# Altium PCB proy_10A_PCB_1_v1i1.PcbDoc
Units mil, origin at the board's own origin, x right, y up, seen from the top; angles counter-clockwise.
Board outline 4400 x 1900 mil, 2 copper layers (Top Layer, Bottom Layer); 42 components, 44 nets, 157 pads, 20 vias.
Unrouted connection lines stored in the file: 2.
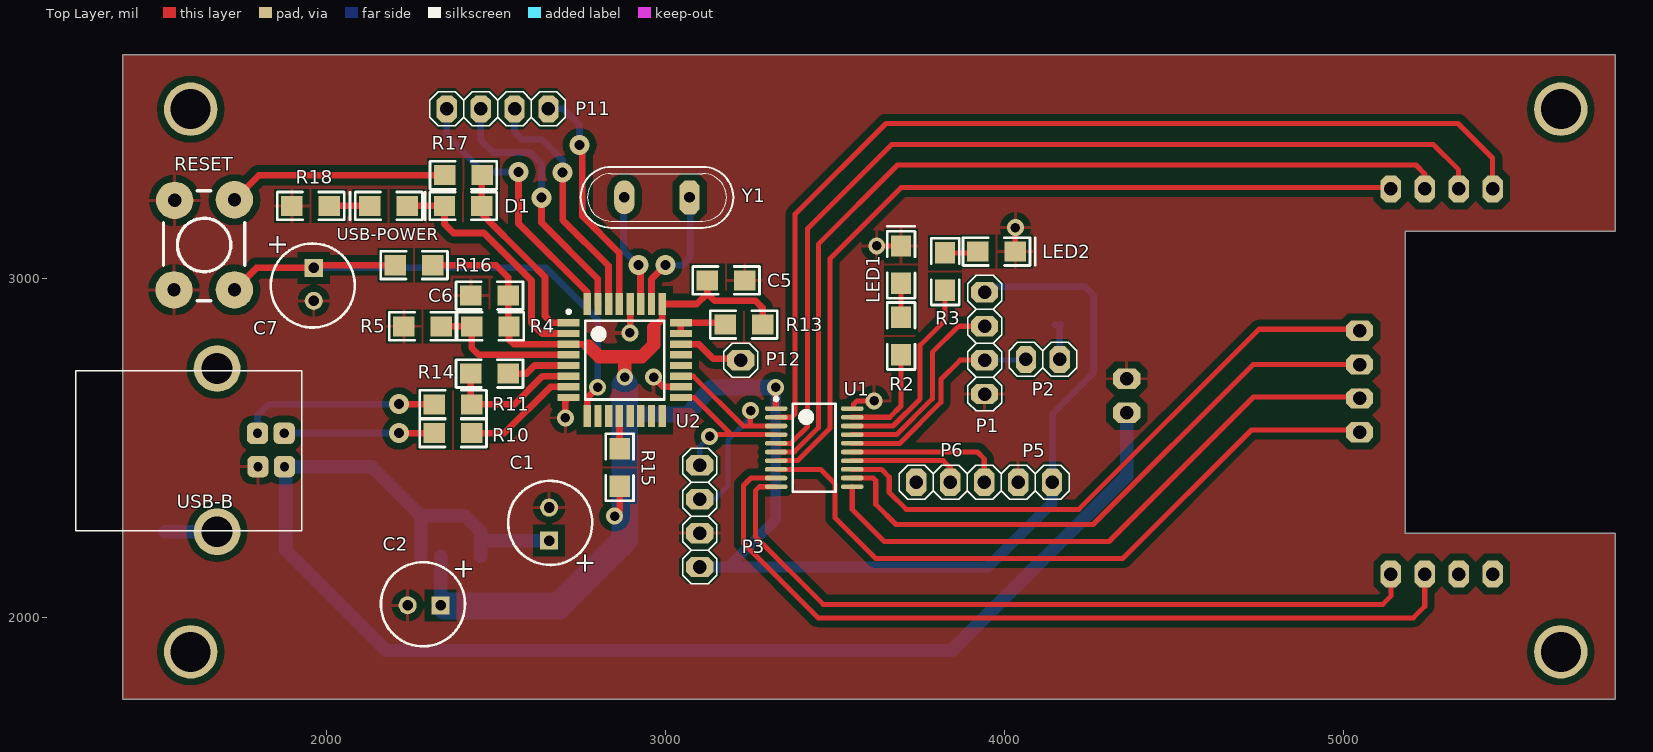
[diagram p0: Top Layer view]
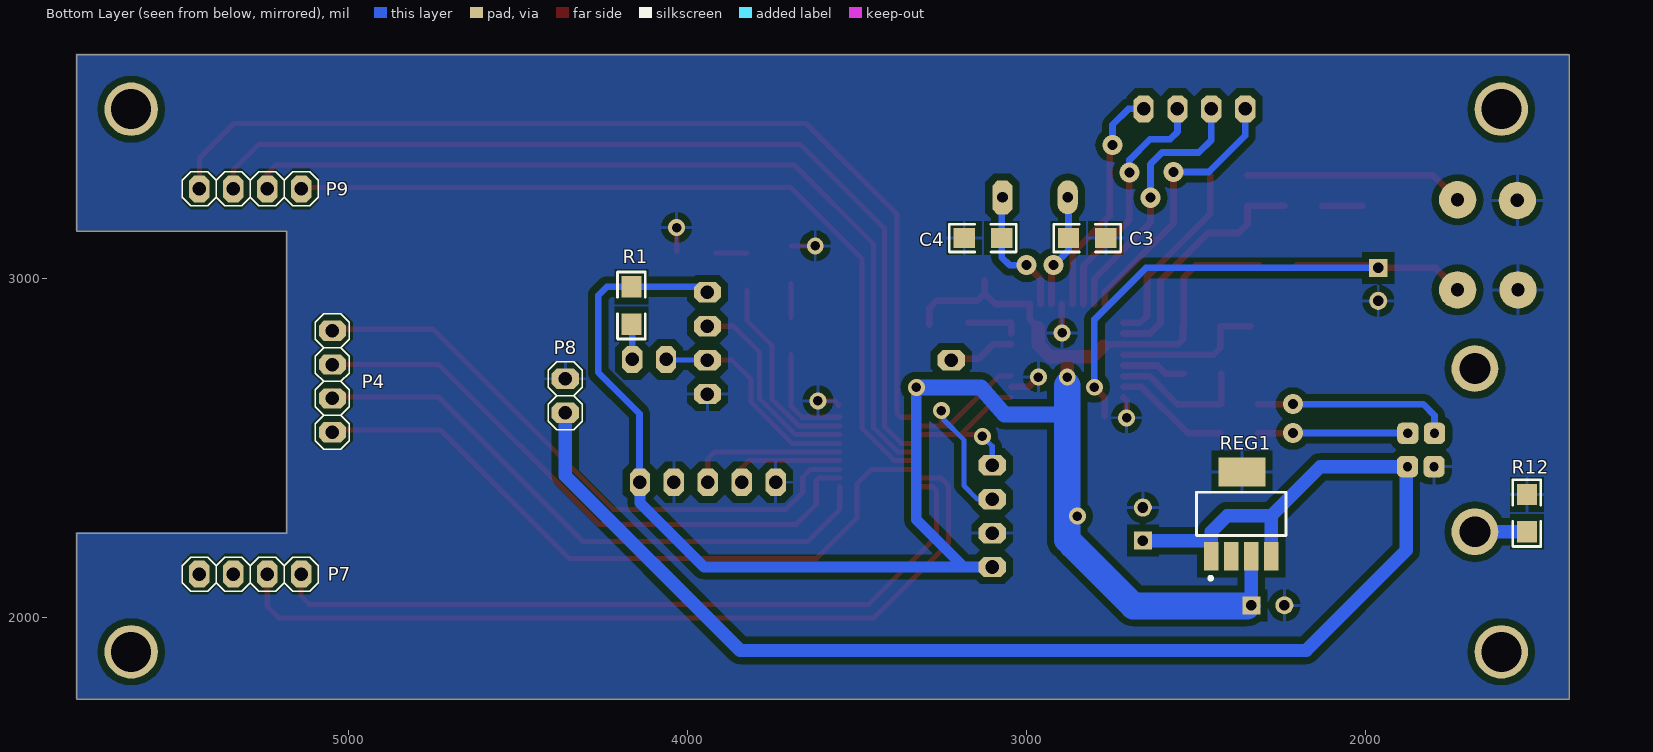
[diagram p1: Bottom Layer view, seen from below]
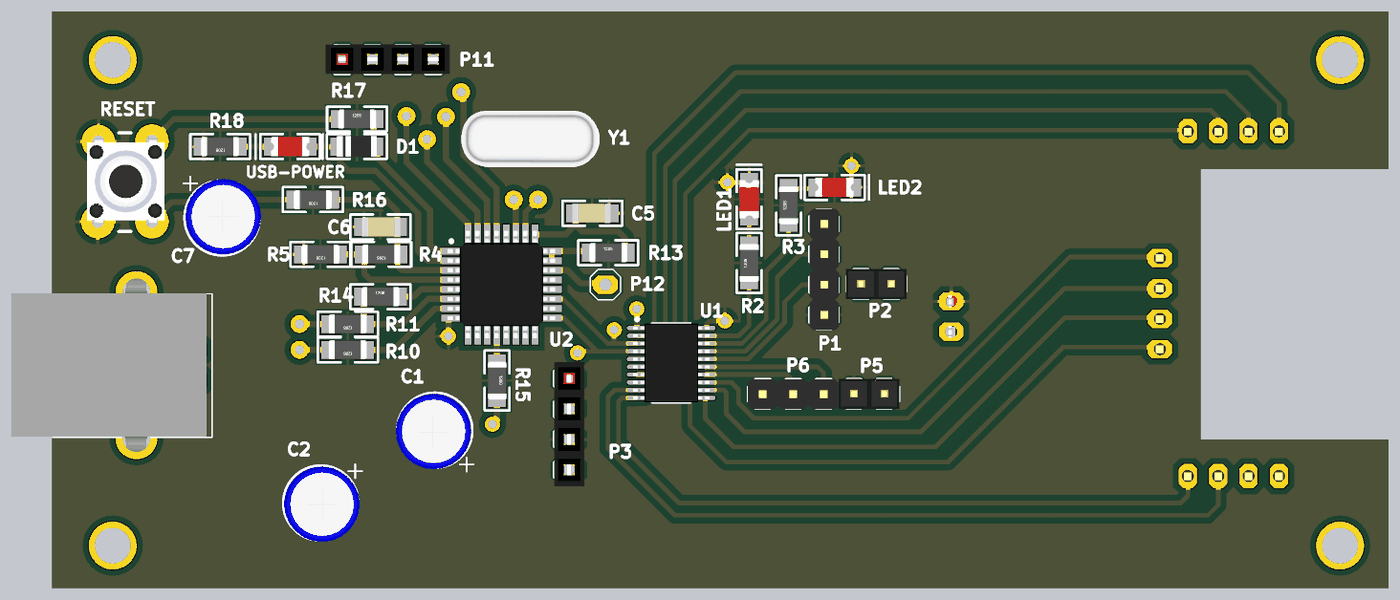
[diagram p2: 3D render of the assembled board from above, using the file's embedded part models]
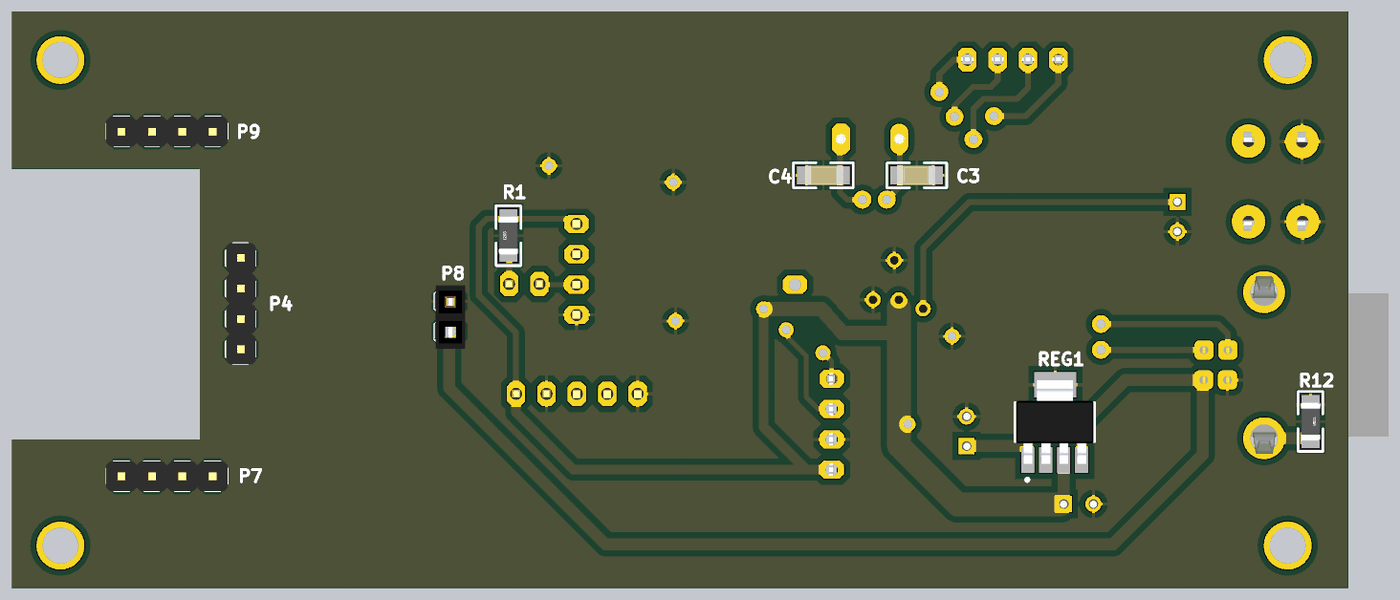
[diagram p3: 3D render of the assembled board from below, using the file's embedded part models]

## Layer stack, top to bottom
Top Layer: signal copper 1.4
Dielectric: dielectric 12.6, FR-4, Dk 4.8
Bottom Layer: signal copper 1.4

## Board outline
1400,1760 5800,1760 5800,2250 5181.1,2250 5181.1,3140 5800,3140 5800,3660 1400,3660

## Design rules (kind name [scope] priority, off if disabled: settings)
Clearance "Poly Clearance" [(InNet('GND'))] p1: gap=5
Clearance [All] p2: gap=1
ComponentClearance [All] p1: gap=0 collisioncheckmode=3 verticalgap=0 showdistances=FALSE
HoleSize [All] p1: absolutevalues=TRUE maxlimit=200 minlimit=1 maxpercent=80.000 minpercent=20.000
HoleToHoleClearance [All] p1: gap=0 allowstackedmicrovias=TRUE
MinimumSolderMaskSliver [All] p1: minsoldermaskwidth=0
PlaneClearance [All] p1: clearance=19.68
PlaneConnect [All] p1: planeconnectstyle=Direct reliefexpansion=20 reliefentries=4 reliefconductorwidth=10 reliefairgap=10
PolygonConnect [All] p1: connectstyle=Relief reliefconductorwidth=10 reliefentries=4 polygonreliefangle="90 Angle"
RoutingVias [All] p1: holewidth=28 width=50 viastyle="Through Hole" minholewidth=28 minwidth=50 maxholewidth=28 maxwidth=50
SilkToSilkClearance [All] p1: silktosilkclearance=0
SilkscreenOverComponentPads [IsPad] p1: minsilkscreentomaskgap=0
SolderMaskExpansion [All] p1: expansion=4
Width [All] p1: maxlimit=78.74 minlimit=10 preferedwidth=19.68
20 further rules are at their usual default settings.

## Classes and differential pairs
component class "[04] - MICROCONTROLADOR": LED1 LED2 P1 P2 P3 P4 P5 P6 P7 P8 P9 R1 R2 R3 U1
component class "[03] - USB-UART": C1 C2 C3 C4 C5 C6 C7 D1 P11 P12 R4 R5 R10 R11 R12 R13 R14 R15 R16 R17 R18 REG1 RESET U2 USB-B USB-POWER Y1

## Components (designator, comment, footprint, x,y, rotation, side; value= is the part's Value field where it differs from the comment)
C1 "4.7uF" "C 6.3x11" 2660,2280 r90 top
C2 "4.7uF" "C 6.3x11" 2285,2040 r180 top
C3 "33pF" "C 1206" 2890,3195 r0 bottom
C4 "33pF" "C 1206" 3060,3045 r180 bottom
C5 "10nF" "C 1206" 3110,3070 r180 top
C6 "10nF" "C 1206" 2550,2875 r0 top
C7 "4.7uF" "C 6.3x11" 1960,2980 r270 top
D1 "DIODO" "D 1206" 2335,3290 r180 top
LED1 "LED" "LED 1206" 3770,3110 r90 top
LED2 "LED" "LED 1206" 4045,3005 r0 top
P1 "H 1X4" "H 1X4" 3940,2810 r270 top
P2 "H 1X2" "H 1x2" 4115,2760 r180 top
P3 "H 1X4" "H 1X4 - Hembra" 3100,2300 r270 top
P4 "H 1X4" "H 1X4" 5048,2697 r270 bottom
P5 "H 1X2" "H 1x2" 4092,2398 r180 top
P6 "H 1X3" "H 1x3" 3840,2400 r180 top
P7 "H 1X4" "H 1X4" 5289,2130 r0 bottom
P8 "H 1X2" "H 1x2 - Hembra" 4358,2657 r270 bottom
P9 "H 1X4" "H 1X4" 5289,3266 r0 bottom
P11 "H 1X4" "H 1X4 - Hembra" 2505,3500 r0 top
P12 "H 1X1" "H 1x1" 3220,2807.87 r90 top
R1 "47k" "R 1206" 4090,2990 r90 bottom
R2 "220" "R 1206" 3770,2900 r90 top
R3 "220" "R 1206" 3900,3090 r90 top
R4 "90.9k" "R 1206" 2415,2935 r180 top
R5 "100k" "R 1206" 2215,2935 r180 top
R10 "33" "R 1206" 2305,2620 r180 top
R11 "33" "R 1206" 2305,2705 r180 top
R12 "33k" "R 1206" 1600,2240 r270 bottom
R13 "10k" "R 1206" 3300,2790 r0 top
R14 "1.5k" "R 1206" 2550,2645 r0 top
R15 "10k" "R 1206" 2790,2375 r270 top
R16 "15k" "R 1206" 2190,3115 r180 top
R17 "32k" "R 1206" 2473,3230 r0 top
R18 "220" "R 1206" 1885,3290 r180 top
REG1 "LP38693MP-3.3/NOPB" SOT223-5 2365,2300 r180 bottom
RESET "Pulsador NA 4 term" "TACT SW" 1640,3100 r270 top (schematic designator SW1)
U1 "MSP430G2553IN20" PW-20 3440,2500 r0 top
U2 "TUSB3410VF" TQFP-32 2880,2760 r0 top
USB-B "USB-B" USBB 1610,2495 r0 top (schematic designator P10)
USB-POWER "LED" "LED 1206" 2115,3290 r180 top (schematic designator LED7)
Y1 "12MHz" "Y TRHU" 2975,3240 r180 top

## Footprints (in the part's own frame and the unit in brackets; to place one, negate y for a bottom-side part, rotate by r counter-clockwise, add the part's x,y. Pads: shape width x height; smd on the part's side, far side on the other; paste and mask are expansions set on the pad)
"C 6.3x11" [mm] "Capacitor  Electrolitico Radial 6.3mm diametro  x 11mm de altura (2.5mm entre pines)"
  rect 1.35x1.35 hole 0.8: 1(-1.325,0.075)
  round 1.35 hole 0.8: 2(1.15,0.075)
  silkscreen extent -3.15,-3.15 3.15,3.15, body extent -3.27,-3.08 3.08,3.27, height 11.13
"C 1206" [mm]
  rect 1.6x1.5 smd: 1(-3.144,1.911) 2(-0.344,1.911)
  silkscreen extent -4.25,0.86 0.75,2.95, body extent -3.28,1.11 -0.08,2.71, height 0.77
"D 1206" [mm]
  rect 1.6x1.5 smd: 1(-3.144,1.911) 2(-0.344,1.911)
  silkscreen extent -4.25,0.86 1.12,2.95, body extent -3.41,1.04 -0.06,2.77, height 0.85
"H 1x1" [mil]
  oct 60x80 hole 40: 1(-48,-2)
  silkscreen extent -98,-52 2,48
"H 1x2" [mil]
  oct 60x80 hole 40: 1(-48,-2) 2(52,-2)
  silkscreen extent -98,-52 102,48, body extent -98,-52 102,48, height 338
"H 1x2 - Hembra" [mil]
  oct 60x80 hole 40: 1(-48,-2) 2(52,-2)
  silkscreen extent -98,-52 102,48, body extent -101,-47 109,51, height 335
"H 1x3" [mil]
  oct 60x80 hole 40: 1(-100,0) 2(0,0) 3(100,0)
  silkscreen extent -150,-50 150,50, body extent -150,-48 150,50, height 338
"H 1X4" [mil]
  oct 60x80 hole 40: 1(-150,1) 2(-50,1) 3(50,1) 4(150,1)
  silkscreen extent -200,-49 200,51, body extent -200,-47 200,51, height 337
"H 1X4 - Hembra" [mil]
  oct 60x80 hole 40: 1(-150,1) 2(-50,1) 3(50,1) 4(150,1)
  silkscreen extent -200,-49 200,51, body extent -205,-46 205,52, height 335
"LED 1206" [mm]
  rect 1.6x1.5 smd: 1(-3.144,1.911) 2(-0.344,1.911)
  silkscreen extent -4.25,0.86 1.14,2.95, body extent -3.35,1.11 -0.15,2.71, height 1.1
PW-20 [mm]
  oval 1.7x0.35 smd: 1(-2.888,2.973) 2(-2.888,2.323) 3(-2.888,1.673) 4(-2.888,1.023) 5(-2.888,0.373) 6(-2.888,-0.277) 7(-2.888,-0.927) 8(-2.888,-1.577) 9(-2.888,-2.227) 10(-2.888,-2.877) 11(2.812,-2.877) 12(2.812,-2.227) 13(2.812,-1.577) 14(2.812,-0.927) 15(2.812,-0.277) 16(2.812,0.373) 17(2.812,1.023) 18(2.812,1.673) 19(2.812,2.323) 20(2.812,2.973)
  silkscreen extent -3.01,-3.25 1.56,3.82, body extent -3.23,-3.26 3.17,3.34, height 1.2
"R 1206" [mm]
  rect 1.6x1.5 smd: 1(-3.144,1.911) 2(-0.344,1.911)
  silkscreen extent -4.25,0.86 0.75,2.95, body extent -3.34,1.11 -0.14,2.71, height 1
SOT223-5 [mm]
  rect 3.5x2.15 smd: 0(0,3.3)
  rect 1.1x2.15 smd: 1(-2.3,-3) 2(-0.8,-3) 3(0.7,-3) 4(2.2,-3)
  silkscreen extent -3.39,-4.78 3.31,1.8, body extent -3.29,-3.3 3.21,3.66, height 1.7
"TACT SW" [mm]
  round 2.8 hole 1: 1(-3.375,2.262) 1(3.375,2.262) 2(-3.325,-2.212) 2(3.375,-2.262)
  silkscreen extent -4.06,-3.05 4.19,3.05, body extent -4.13,-3.18 4.13,3.33, height 5.25
TQFP-32 [mm] "Thin QFP, 32-Leads, Body 7x7mm, Pitch 0.8mm, IPC Medium Density"
  rect 1.65x0.55 smd: 1(-4.2,2.8) 2(-4.2,2) 3(-4.2,1.2) 4(-4.2,0.4) 5(-4.2,-0.4) 6(-4.2,-1.2) 7(-4.2,-2) 8(-4.2,-2.8) 17(4.2,-2.8) 18(4.2,-2) 19(4.2,-1.2) 20(4.2,-0.4) 21(4.2,0.4) 22(4.2,1.2) 23(4.2,2) 24(4.2,2.8)
  rect 0.55x1.65 smd: 9(-2.8,-4.2) 10(-2,-4.2) 11(-1.2,-4.2) 12(-0.4,-4.2) 13(0.4,-4.2) 14(1.2,-4.2) 15(2,-4.2) 16(2.8,-4.2) 25(2.8,4.2) 26(2,4.2) 27(1.2,4.2) 28(0.4,4.2) 29(-0.4,4.2) 30(-1.2,4.2) 31(-2,4.2) 32(-2.8,4.2)
  silkscreen extent -4.32,-2.95 2.95,3.75, body extent -4.51,-4.51 4.49,4.49, height 1.5
USBB [mm]
  round 3.5 hole 2.3: 0(1.725,-6.125) 0(1.725,6.1)
  rrect50% 1.6x1.6 hole 0.7: 1(6.775,-1.248) 2(6.75,1.25) 3(4.75,1.25) 4(4.785,-1.248)
  silkscreen extent -8.85,-6.05 8.05,5.95, body extent -8.7,-7.43 7.6,7.43, height 10.25
"Y TRHU" [mm] "Cristal de cuarzo pasante."
  oct 1.524x2.54 hole 0.8: 1(-2.44,0)
  oval 1.524x2.54 hole 0.8: 2(2.44,0)
  silkscreen extent -5.71,-2.29 5.71,2.29, body extent -5.63,-2.35 5.72,2.3, height 3.5

## Part data
C1 C2 C7: library part "C POL", "Capacitor polarizado."
C3 C4 C5 C6: library part C, "Capacitor"
P1 P3 P4 P7 P9 P11: "PIN HEADER 1X4"
P2 P5 P8: "PIN HEADER 1X2"
P6: "PIN HEADER 1X3"
P12: "PIN HEADER 1X1"
R1 R2 R3 R4 R5 R10 R11 R12 R13 R14 R15 R16 R17 R18: library part R, "Resistencia"
REG1: "IC REG LDO 3.3V 0.5A SOT223-5"
U1: "IC MCU 16BIT 16KB FLASH 20PDIP"
U2: "IC CONV SERIAL-TO-USB 32-LQFP"
USB-B: "Conector USB tipo B"
Y1: library part "Cristal de Cuarzo", "Cristal de cuarzo"

## Free pads (board coordinates)
  round 157.48 hole 118.11: ""(1600,1900) ""(1600,3500) ""(5640,1900) ""(5640,3500)

## Via types
v1: diameter 50, hole 28, Top Layer to Bottom Layer, 12 vias
v2: diameter 59.06, hole 29.53, Top Layer to Bottom Layer, 8 vias

## Nets (pads, with @x,y where several pads share a name; then routed paths per layer and width w, separated by ;. In a path a pad name is that pad's centre, name@x,y a point inside that pad or via, vN(x,y) a via of type N, cw(c..) or ccw(c..) an arc to the next point about the centre after c; other vN are vias at no path point)
+1P8V: R4.2 R5.1 U2.4 | length 447.7
  Top Layer w19.68: R5.1 R4.2 2428.53,2796.47 2449.25,2775.75 U2.4
+3P3V: C2.1 C5.2 C6.2 P1.1 P3.4 P5.1 R1.2 R4.1 R13.2 R15.2 R16.1 REG1.3 U1.1 U2.3 U2.25 | length 5982.5
  Top Layer w19.68: R16.1 2500.25,3039.75 2536.47,3003.53 C6.2 R4.1@2536.47,2862.04 ; R4.1 2538.76,2821.24 2552.76,2807.24 U2.3 2767.76,2807.24 ; v1@2865.25,2315.25 R15.2 ; 2965,2855 2990.24,2880.24 U2.25 3092.41,2925.35 3123.53,2956.47 ; C5.2 3123.53,2956.47 ; R13.2 3286.47,2913.53 3265,2935 3145,2935 3123.53,2956.47 ; 3325,2625 v1(3325,2679.84)
  Top Layer w39.37: 2773.72,2801.28 2805,2770 2880,2770 ; v1(2880,2710) 2880,2770 ; 2965,2855 2965,2805 2930,2770 2880,2770
  Bottom Layer w19.68: P1.1 3957.47,2976.47 R1.2 4237.53,2976.47 4263,2951 4263,2724 4141,2602 4141,2409 P5.1@4148,2402
  Bottom Layer w31.5: P3.4 3185,2150 ; v1(3325,2679.84) 3325,2290 3185,2150 ; P5.1 4140,2338.82 3951.18,2150 3185,2150
  Bottom Layer w39.37: C2.1 2337.44,2037.05 REG1.3
  Bottom Layer w47.24: 2880,2600 3065,2600 3135,2679.84 v1(3325,2679.84)
  Bottom Layer w78.74: C2.1@2350,2035 2685,2035 2865,2215 ; 2880,2230 2880,2600 2880,2685
  other v1: 2850,2300
+5V: C1.1 P8.2 REG1.1 REG1.4 USB-B.1 | length 4298.1
  Bottom Layer w39.37: REG1.4 2278.39,2301.61 ; REG1.1 2455.55,2225 ; C1.1 2458.39,2227.84 2455.55,2225 ; P8.2 4360,2419 3845,1904 2175,1904 1880,2199 1880,2445.85 2134.15,2445.85 2278.39,2301.61 ; 2278.39,2301.61 2408.39,2301.61 2455.55,2254.45 2455.55,2225
CLKOUT: P12.1 U2.22 | length 196.3
  Top Layer w19.68: U2.22 3097.76,2807.24 3140.49,2764.51 3217.37,2764.51 P12.1
DM: R10.1 U2.7 | length 342.4
  Top Layer w19.68: R10.1 2524.75,2544.75 2661.26,2681.26 U2.7
DP: R11.1 R14.1 U2.6 | length 411.8
  Top Layer w19.68: R14.1 2426.24,2632.28 R11.1 2554.75,2629.75 2637.76,2712.76 U2.6
GND: C1.2 C2.2 C3.1 C4.1 C5.1 C6.1 C7.2 LED1.2 LED2.2 P1.4 P3.3 P5.2 P6.3 P8.1 R5.2 R12.1 R18.2 REG1.0 RESET.2 U1.20 U2.8 U2.18 U2.28 USB-B.4 | length 449
  Top Layer w15: 3555,2625 3555,2630 3565,2640 v1(3615,2640) ; v1@3623.53,3096.47 LED1.2 ; LED2.2 4031.47,3146.47 v1@4032,3147
  Top Layer w19.68: v1(2705,2590) 2705,2640.12 U2.8 ; v1(2895,2840) 2895.75,2840.75 U2.28 ; v1(2965,2710) 2993.74,2681.26 U2.18
  other v1: 3623,3097 4032,3151
MCU_LED1: R2.1 U1.19 | length 309.3
  Top Layer w15: U1.19 3661.47,2591.47 3694.75,2624.75 R2.1
MCU_LED2: R3.1 U1.18 | length 584.5
  Top Layer w15: U1.18 3659.12,2565.88 3671.23,2565.88 3751,2645.64 3751,2804 3824.75,2877.75 R3.1
MCU_M1_1: P9.4 U1.2 | length 2949.3
  Top Layer w15: U1.2 3371.47,2591.47 3382.58,2602.58 3382.58,3190.58 3650,3458 5337,3458 5439,3356 P9.4
MCU_M1_2: P9.3 U1.5 | length 2806.9
  Top Layer w15: U1.5 3369.7,2514.7 3419.29,2564.29 3419.29,3148.29 3667,3396 5264,3396 5339,3321 P9.3
MCU_M2_1: P4.1 U1.13 | length 1802.2
  Top Layer w15: U1.13 3637.08,2437.92 3660,2415 3660,2370 3710,2320 4219,2320 4750,2851 5045,2851 P4.1@5054,2842
MCU_M2_2: P4.2 U1.12 | length 1789.5
  Top Layer w15: U1.12 3612.31,2412.33 3620,2404.64 3620,2335 3680,2275 4261,2275 4733,2747 P4.2
MCU_M3_1: P4.3 U1.11 | length 1787.1
  Top Layer w15: U1.11 3550.7,2319.3 3645,2225 4308,2225 4734,2651 5028,2651 P4.3@5047,2670
MCU_M3_2: P7.1 U1.10 | length 2232.9
  Top Layer w15: U1.10 3276.74,2386.74 3265,2375 3265,2240 3465,2040 5115,2040 5139,2064 P7.1
MCU_M4_1: P7.2 U1.9 | length 2484.8
  Top Layer w15: U1.9 3252.33,2412.33 3230,2390 3230,2220 3450,2000 5205,2000 5239,2034 P7.2
MCU_M4_2: P4.4 U1.8 | length 2045.2
  Top Layer w15: U1.8 3457.08,2437.92 3499.74,2395.26 3499.74,2295.26 3620,2175 4348.71,2175 4727.71,2554 P4.4@5047,2554
MCU_M5_1: P9.1 U1.7 | length 2439.1
  Top Layer w15: U1.7 3389.22,2463.51 3485,2559.29 3485,3059 3695,3269 P9.1@5139,3269
MCU_M5_2: P9.2 U1.6 | length 2635
  Top Layer w15: U1.6 3326.89,2489.7 3380.05,2489.7 3450.79,2560.43 3450.79,3101.79 3684,3335 5213,3335 5239,3309 P9.2
MCU_RST: P1.3 P2.2 U1.16 | length 657.4
  Top Layer w15: U1.16 3691.7,2514.7 3750,2573 3750,2573.64 3812,2635.64 3812,2703 3869,2760 P1.3 ; P2.2@4061,2760 P2.2
  Bottom Layer w15: P1.3 4061,2760 P2.2
MCU_RX: P3.2 U1.3 U2.19 | length 743.4
  Top Layer w15: U2.19 3082.24,2712.76 3229.12,2565.88 3250,2565.88 ; v1@3245,2615 3250,2610 3250,2565.88 ; U1.3 3250,2565.88
  Bottom Layer w15: P3.2 3145,2350 3185,2390 3185,2525 3245,2585 v1@3245,2615
  other v1: 3250.91,2611.06
MCU_SCL: P6.2 U1.14 | length 340.8
  Top Layer w15: U1.14 3819.49,2463.51 3840,2443 P6.2
MCU_SDA: P6.1 U1.15 | length 466.6
  Top Layer w15: U1.15 3919.9,2489.1 3940,2469 P6.1
MCU_TEST: P1.2 U1.17 | length 603
  Top Layer w15: U1.17 3681.29,2540.29 3787,2646 3787,2783 3864,2860 P1.2
MCU_TX: P3.1 U1.4 U2.17 | length 490.2
  Top Layer w15: U2.17 3085.24,2649.76 3194.71,2540.29 ; v1(3130,2535) 3135.29,2540.29 3194.71,2540.29 ; U1.4 3194.71,2540.29
  Bottom Layer w15: P3.1 3101,2506 v1(3130,2535)
NetC3_2: C3.2 U2.27 Y1.2 | length 336.7
  Top Layer w19.68: v2(2920,3040) 2926.42,3033.58 2926.42,2926.18 U2.27
  Bottom Layer w19.68: Y1.2 2876.47,3237.54 C3.2 2876.47,3083.53 v2(2920,3040)
NetC4_2: C4.2 U2.26 Y1.1 | length 392.5
  Top Layer w19.68: U2.26 2958.74,2998.74 v2(3000,3040)
  Bottom Layer w19.68: v2(3000,3040) 3050,3040 3073.53,3063.53 C4.2 3073.53,3237.54 Y1.1
NetLED1_1: LED1.1 R2.2 | length 99.8
  Top Layer w15: R2.2 LED1.1
NetLED2_1: LED2.1 R3.2 | length 92.7
  Top Layer w15: R3.2 LED2.1@3917.46,3076.47
NetLED7_2: R18.1 USB-POWER.2 | length 119.8
  Top Layer w19.68: R18.1 USB-POWER.2
NetP2_1: P2.1 R1.1 | length 108.4
  Bottom Layer w19.68: R1.1@4148,2863.98 R1.1@4150.25,2866.24 ; P2.1 4163,2863.98 R1.1
NetP10_0: R12.2 USB-B.0 | length 152.8
  Bottom Layer w39.37: R12.2 USB-B.0@1677.58,2253.53
NetP10_2: R10.2 USB-B.2 | length 442.5
  Top Layer w19.68: v2@2215.25,2544.75 R10.2
  Bottom Layer w19.68: USB-B.2@1875.75,2545 v2(2215,2545)
NetP10_3: R11.2 USB-B.3 | length 587.7
  Top Layer w19.68: v2@2215.25,2629.75 R11.2
  Bottom Layer w19.68: USB-B.3 1797.01,2597.01 1830,2630 v2(2215,2630)
NetP11_1: P11.1 U2.32 | length 816.1
  Top Layer w19.68: v2@2585,3315 2566.93,3296.93 2566.93,3163.07 2769.76,2960.24 U2.32
  Bottom Layer w19.68: P11.1 2355,3422.56 2462.6,3314.96 v2(2566.93,3314.96)
NetP11_2: P11.2 U2.31 | length 782.5
  Top Layer w19.68: v2(2634.57,3238.82) 2634.57,3165.43 2800.43,2999.57 2800.43,2926.18 U2.31
  Bottom Layer w19.68: P11.2 2455,3409.17 2492.13,3372.05 2600.39,3372.05 2634.57,3337.87 v2(2634.57,3238.82)
NetP11_3: P11.3 U2.30 | length 765.5
  Top Layer w19.68: P11.3@2555,3480 P11.3 ; v2@2710.32,3324.68 2696.85,3311.22 2696.85,3173.46 2831.93,3038.39 2831.93,2926.18 U2.30
  Bottom Layer w19.68: P11.3 2555,3433.19 2576.77,3411.42 2635.83,3411.42 2696.85,3350.39 v2@2696.85,3311.02
  other v2: 2696.85,3312.99
NetP11_4: P11.4 U2.29 | length 685.1
  Top Layer w19.68: v2@2755,3400.24 2755,3185 2863.43,3076.57 2863.43,2926.18 U2.29
  Bottom Layer w19.68: P11.4 2699.79,3501 2746.77,3454.02 v2@2746.77,3400.24
  other v2: 2746.77,3394.33
NetR13_1: R13.1 U2.23 U2.24 | length 157.4
  Top Layer w19.68: U2.23 U2.24 R13.1@3171.25,2870.24
NetR14_2: R14.2 U2.5 | length 188.1
  Top Layer w19.68: R14.2 2590.25,2720.25 2614.25,2744.25 U2.5
NetR15_1: R15.1 U2.12 | length 96.3
  Top Layer w19.68: U2.12 2864.25,2499.76 R15.1
RST: C7.1 R16.2 R17.1 RESET.1 U2.9 | length 2352.6
  Top Layer w19.68: RESET.1@1729.07,2967.13 1794.11,3032.16 C7.1 1970.54,3039.75 R16.2 ; RESET.1@1729.07,3232.87 1801.45,3305.25 R17.1 ; U2.9 2769.76,2649.76 v1(2800,2680)
  Bottom Layer w19.68: C7.1 2647.84,3032.16 2800,2880 v1(2800,2680)
SUSP: D1.2 U2.2 USB-POWER.1 | length 736.1
  Top Layer w19.68: USB-POWER.1 D1.2 2348.53,3161.47 2375,3135 2465,3135 2605,2995 2605,2870 2636.26,2838.74 U2.2
VREGEN: D1.1 R17.2 U2.1 | length 582.4
  Top Layer w19.68: R17.2@2458.76,3304.54 D1.1 2458.76,3191.24 2594.09,3055.91 ; 2585,3065 2594.09,3055.91 ; U2.1 2664.76,2870.24 2645,2890 2645,3005 2594.09,3055.91
pads on no net: P7.3 P7.4 REG1.2 U2.10 U2.11 U2.13 U2.14 U2.15 U2.16 U2.20 U2.21

## Polygon pours and split planes (outlines as drawn)
GND on Top Layer "Bottom Layer-No Net" (solid, remove dead copper, pour order 2): 1400,1759.84 5800,1759.84 5800,2250 5181.1,2250 5181.1,3139.37 5181.5,3139.76 5800,3139.76 5800,3659.84 1400,3659.84
GND on Bottom Layer "Bottom Layer-No Net" (solid, remove dead copper, pour order 4): 1403.15,1762.99 5803.15,1762.99 5803.15,2253.15 5184.25,2253.15 5184.25,3142.52 5184.65,3142.91 5803.15,3142.91 5803.15,3662.99 1403.15,3662.99

## Silkscreen, mask and mechanical layers (free items; w line width, h text height)
Bordes:
  lines w8: 1400,1760 2160,1760 5800,1760 5800,2250 5181.1,2250 5181.1,3140 5800,3140 5800,3660 1400,3660 1400,1760
  lines w10: 1104.41,1820 1124.41,1760 ; 1104.41,3600 1124.41,3660 ; 1114.41,1760 1134.41,1760 ; 1114.41,3660 1134.41,3660 ; 1124.41,2434.08 1124.41,1760 ; 1124.41,2985.92 1124.41,3660 ; 1144.41,1820 1124.41,1760 ; 1144.41,3600 1124.41,3660 ; 1400,1690.94 1400,1710.94 ; 1460,1680.94 1400,1700.94 ; 1460,1720.94 1400,1700.94 ; 3319.09,1700.94 1400,1700.94 ; 3880.91,1700.94 5800,1700.94 ; 5740,1680.94 5800,1700.94 ; 5740,1720.94 5800,1700.94 ; 5800,1690.94 5800,1710.94
  text "1900 (mil)" at 1160.4,2444.08 h60 r90
  text "4400 (mil)" at 3329.09,1664.95 h60

## Text inside footprints (layer, text, board x,y; h text height)
C1: Top Overlay "+" at 2787.95,2126.46 h59.06 r90; Mechanical 29 "+" at 2748,2192 h59.06 r90
C2: Top Overlay "+" at 2438.54,2167.95 h59.06 r180; Mechanical 29 "+" at 2373,2128 h59.06 r180
C7: Top Overlay "+" at 1832.05,3133.54 h59.06 r270; Mechanical 29 "+" at 1872,3068 h59.06 r270